# Altium PCB Module+.PcbDoc
Units mil, origin at the board's own origin, x right, y up, seen from the top; angles counter-clockwise.
Board outline 59055.12 x 27559.06 mil, 2 copper layers (Top Layer, Bottom Layer); 170 components, 151 nets, 558 pads, 61 vias.
Unrouted connection lines stored in the file: 22.
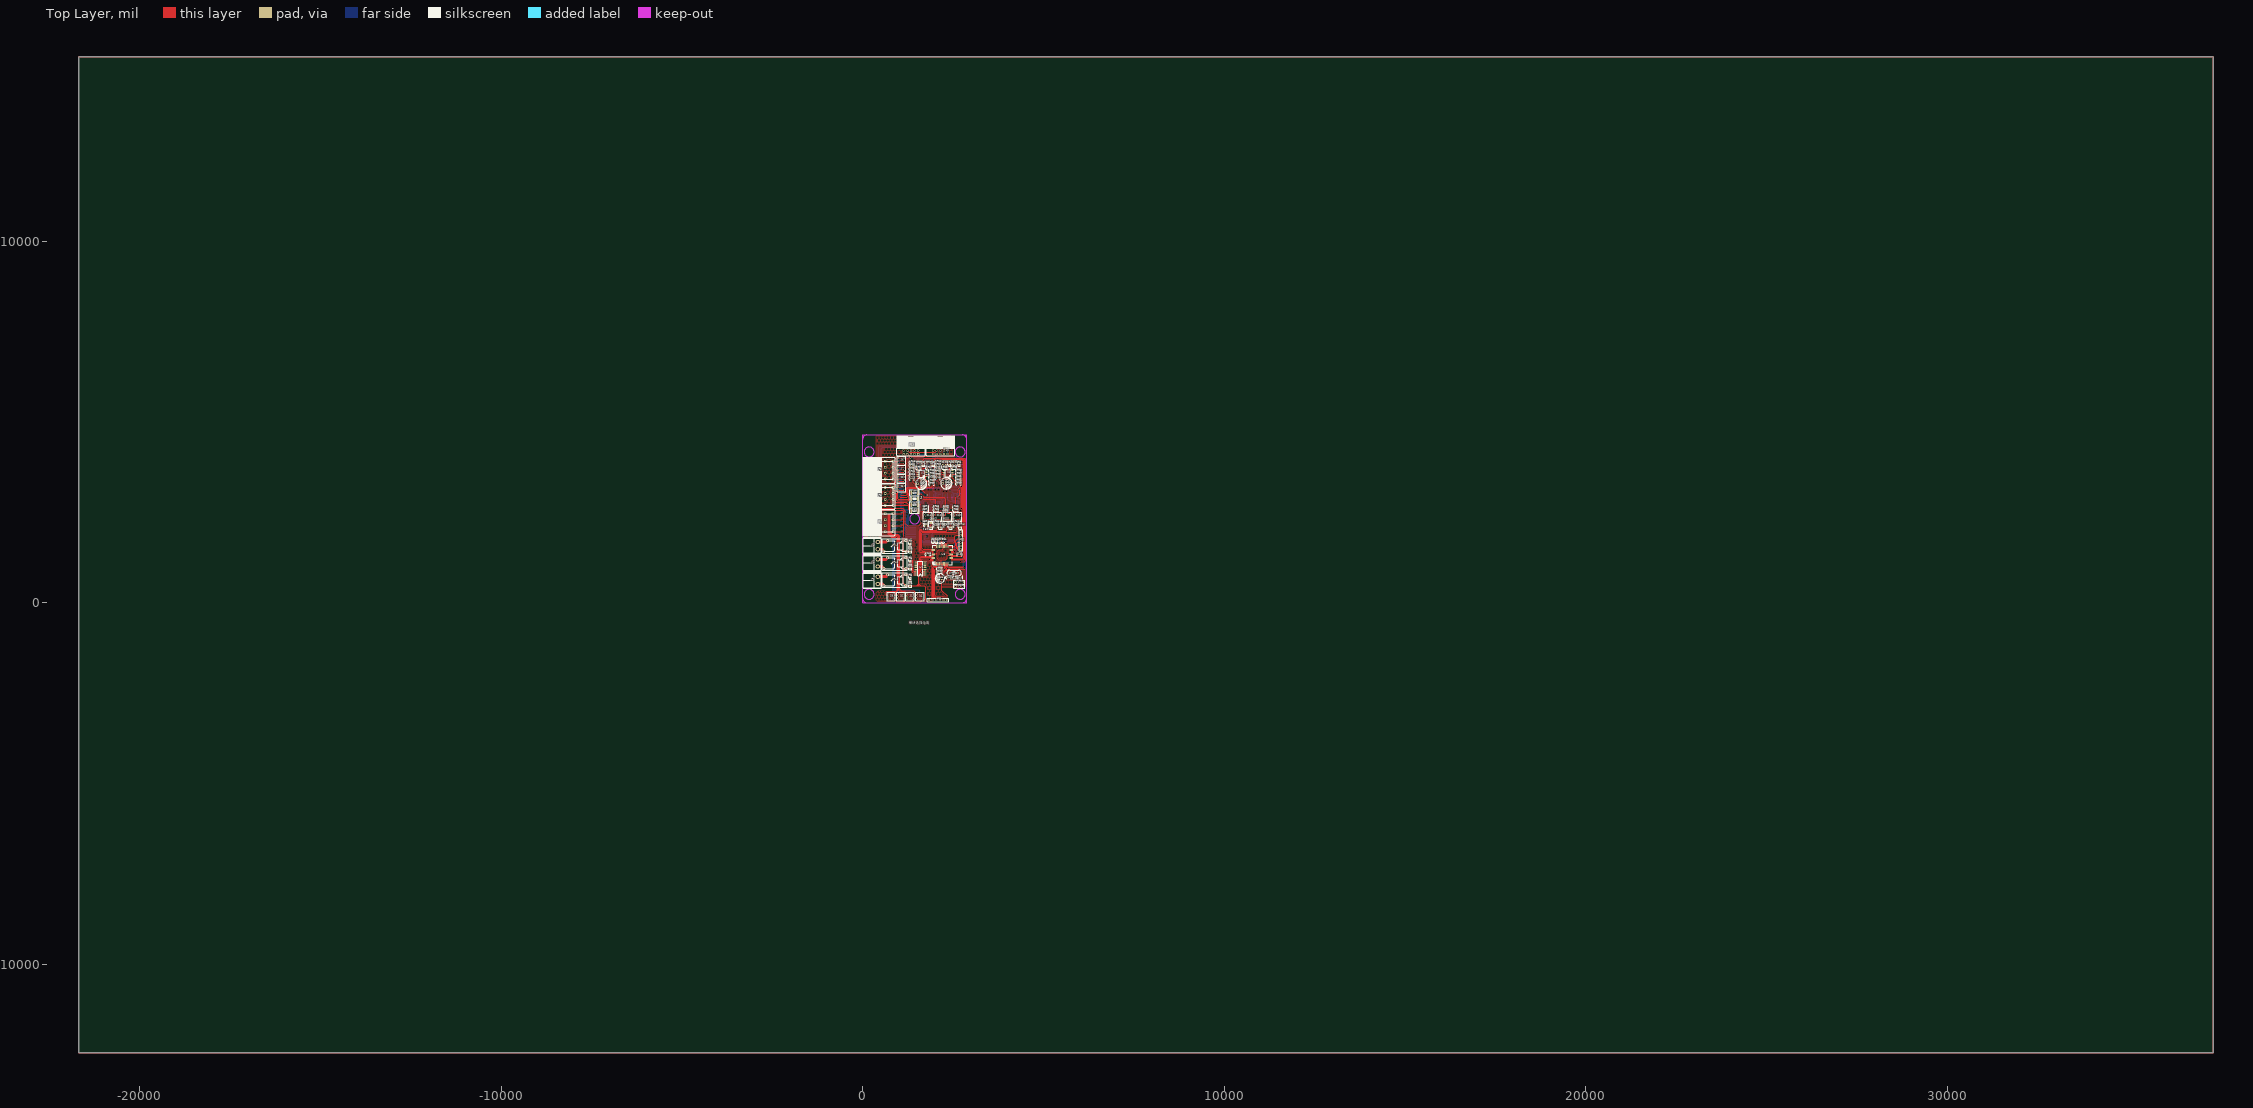
[diagram p0: Top Layer view]
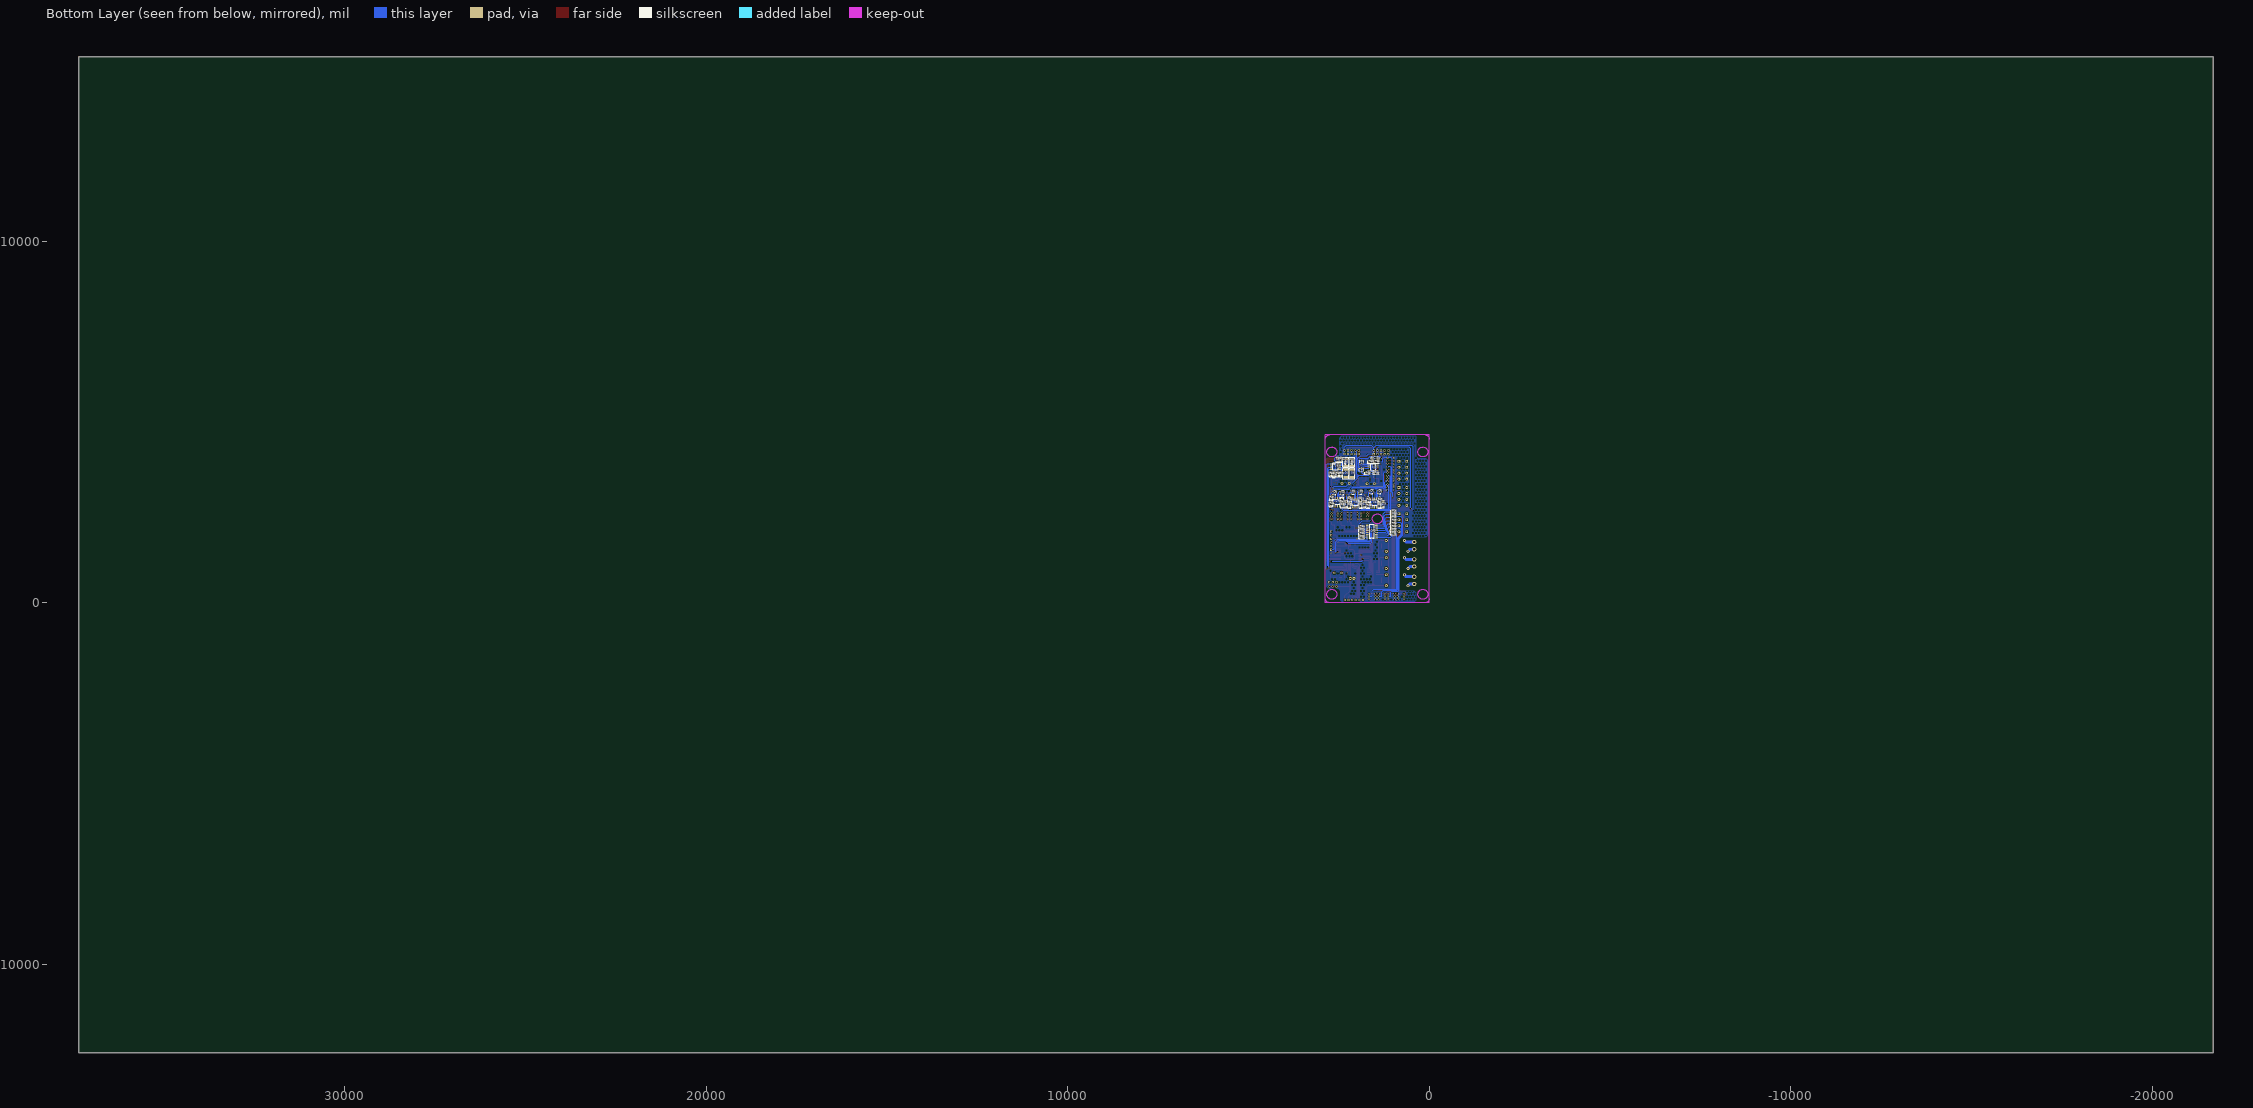
[diagram p1: Bottom Layer view, seen from below]
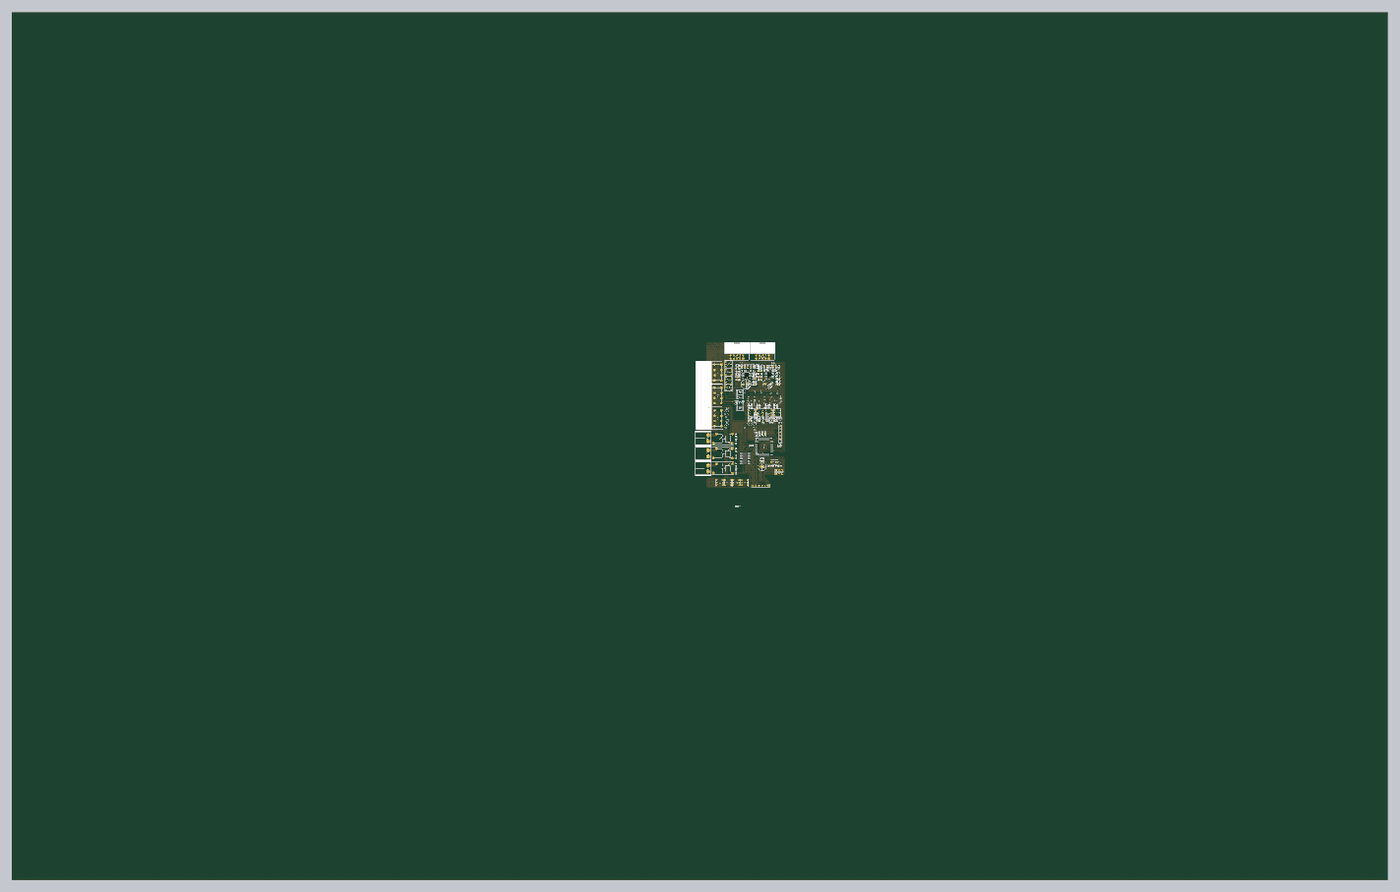
[diagram p2: 3D render of the assembled board from above, using the file's embedded part models]
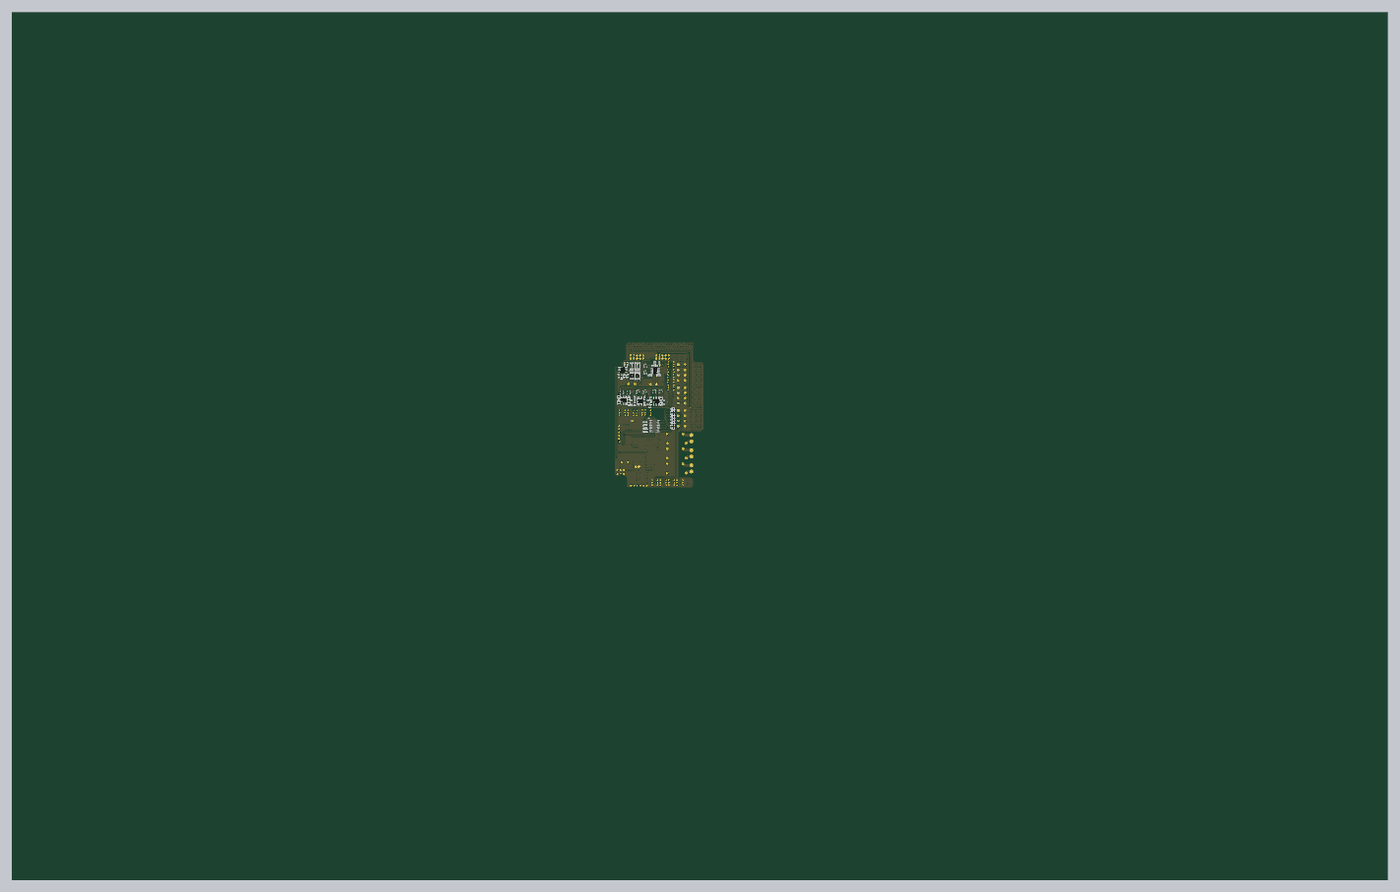
[diagram p3: 3D render of the assembled board from below, using the file's embedded part models]

## Layer stack, top to bottom
Top Solder: solder mask 0.4, Solder Resist, Dk 3.5
Top Layer: signal copper 1.4
Dielectric 1: dielectric 12.6, FR-4, Dk 4.8
Bottom Layer: signal copper 1.4
Bottom Solder: solder mask 0.4, Solder Resist, Dk 3.5

## Board outline
-21689.92,-12450.94 -21689.92,15108.11 37365.2,15108.11 37365.2,-12450.94

## Design rules (kind name [scope] priority, off if disabled: settings)
Clearance Clearance_1 [All] p1: gap=10
Clearance [All] p2 off: gap=20
PolygonConnect [All] p1: connectstyle=Relief reliefconductorwidth=10 reliefentries=4 polygonreliefangle="90 Angle" airgapwidth=10
RoomDefinition Module [InComponentClass('Module')] p1: confinementstyle=ConfineIn formatcopy=TRUE lockcomponents=FALSE outline -12675,-22205.51 33805,-22205.51 33805,-19595.51 -12675,-19595.51
RoutingVias [All] p1: holewidth=28 width=50 viastyle="Through Hole" minholewidth=28 minwidth=50 maxholewidth=28 maxwidth=50
SolderMaskExpansion [All] p1: expansion=4
Width [All] p1: maxlimit=50 minlimit=10 preferedwidth=15 minimp=50.000000 maximp=50.000000 favimp=50.000000
29 further rules are at their usual default settings.

## Components (designator, comment, footprint, x,y, rotation, side; value= is the part's Value field where it differs from the comment)
C1 "105" C0805C 1590,3847.5 r90 top
C2 "105" C0805C 2300,3857.5 r90 top
C3 "105" C0805C 1870,3847.5 r270 top
C4 "105" C0805C 2575,3857.5 r270 top
C5 "105" C0805C 1495,3847.5 r90 top
C6 "105" C0805C 2205,3857.5 r90 top
C7 "105" C0805C 1780,3847.5 r270 top
C8 "105" C0805C 2485,3857.5 r270 top
C9 "104" C0805C 1902.5,3465 r0 top
C10 "104" C0805C 1357.5,3705 r180 top
C11 "104" C0805C 2650.1,3470 r0 top
C12 "104" C0805C 2072.5,3715 r180 top
C13 "104" C0805C 1357.5,3435 r0 top
C14 "104" C0805C 2072.5,3445 r0 top
C15 "220u/35V" E8MM 1620,3295 r0 top
C16 "220u/35V" E8MM 2315,3305 r0 top
C17 "105" C0805C 1902.5,3280 r180 top
C18 "105" C0805C 1357.5,3525 r0 top
C19 "105" C0805C 2650.1,3290 r180 top
C20 "105" C0805C 2072.5,3535 r0 top
C21 "10u/16V" 1206 1500,3985 r180 bottom
C22 "10u/16V" 1206 1805,2720 r270 bottom
C23 "10u/16V" 1206 1285,2720 r270 bottom
C24 "10u/16V" 1206 2313.21,2717.5 r270 bottom
C25 "104" C0805C 2297.5,2135 r180 top
C26 "104" C0805C 2572.5,2135 r180 top
C27 "22p" C0805C 2378,700 r0 top
C28 "22p" C0805C 2698,699.91 r180 top
C29 "104" C0805C 2135,1725 r270 top
C30 "104" C0805C 2125,855 r0 top
C31 "104" C0805C 1757.5,2135 r180 top
C32 "104" C0805C 2672.5,1335 r180 top
C33 "104" C0805C 2022.5,2135 r180 top
C34 "104" C0805C 1802.5,1340 r0 top
C35 "104" C0805C 2230,1725 r90 top
C36 "10uf" E6.5MM 2185,675 r180 top
C37 "104" C0805C 2540,3952.5 r90 bottom
D1 "LED0" LED0805 1310,475 r270 top
D2 "LED0" LED0805 1310,950 r270 top
D3 "LED0" LED0805 1310,1425 r270 top
D4 "LED" LED0805 2636,3588.11 r90 bottom
D5 "SMBJ6.8" SMBJ_SMT 2312.9,3575 r90 bottom
D6 "SMBJ6.8" SMBJ_SMT 2137.9,3575 r90 bottom
DW1 "5.1V" 1206AK 2435,2145 r90 top
DW2 "5.1V" 1206AK 2700,2145 r90 top
DW3 "5.1V" 1206AK 1890,2145 r90 top
DW4 "5.1V" 1206AK 2155,2145 r90 top
F1 "X14" PPTC_SMT 1435,2880 r0 top
F2 "X14" PPTC_SMT 1435,3045 r0 top
F3 "X14" PPTC_SMT 1435.51,2550 r0 top
F4 "X14" PPTC_SMT 1435,2715 r0 top
F5 "X14" PPTC_SMT 2312.9,3880.56 r270 bottom
F6 "X14" PPTC_SMT 2137.9,3880.56 r270 bottom
OP1 "PS2512-4" SO_16 1590,1970 r90 bottom
P1 "DO" PL2Q 417,623 r270 top locked
P2 "DO" PL2Q 417,1102 r270 top locked
P3 "DO" PL2Q 417,1581 r270 top locked
P4 "DI输入" "8P _COM" 731.27,2215.03 r270 top locked
P5 "电压电流转换" "8P _COM" 731.27,3669.97 r270 top locked
P6 "AI输入" "8P _COM" 731.27,2942.5 r270 top locked
P8 "GND" HDR1X3 2570,450 r0 top
P9 "VCC" HDR1X3 2570,570 r0 top
P11 "JTAG" HDR1X6 2715,1470 r90 top
P12 "SPI" HDR1X6 2335,80 r180 top
P13 "Header 10H" FC10P_WAN 1334,4164 r180 top
P14 "Header 10H" FC10P_WAN 2148,4165 r180 top
Q1 "NPN" SOT_23 1875,3890 r180 bottom
Q2 "NPN" SOT_23 1900,3050 r270 bottom
Q3 "NPN" SOT_23 1380,3065 r270 bottom
Q4 "NPN" SOT_23 2408.21,3037.5 r270 bottom
Q5 "PNP" SOT_23 1875,3675 r180 bottom
Q6 "PNP" SOT_23 2115,3050 r270 bottom
Q7 "PNP" SOT_23 1595,3065 r270 bottom
Q8 "PNP" SOT_23 2623.21,3037.5 r270 bottom
R1 "100K" 0805R 1960,3847.5 r90 top
R2 "100K" 0805R 1685,3847.5 r90 top
R3 "100K" 0805R 2665,3857.5 r90 top
R4 "100K" 0805R 2395,3857.5 r90 top
R5 "1K" 0805R 1311,732.5 r90 top
R6 "1K" 0805R 1311,1207.5 r90 top
R7 "1K" 0805R 1311,1680 r90 top
R8 "100K" 0805R 1822.5,3720 r0 top
R9 "100K" 0805R 1547.5,3720 r0 top
R10 "100K" 0805R 2527.5,3740 r0 top
R11 "100K" 0805R 2262.5,3730 r0 top
R12 "10K" 0805R 1902.5,3645 r0 top
R13 "10K" 0805R 1357.5,3885 r180 top
R14 "10K" 0805R 2650.1,3655 r0 top
R15 "10K" 0805R 2072.5,3895 r180 top
R16 "10K" 0805R 1902.5,3555 r180 top
R17 "10K" 0805R 2650,3560 r180 top
R18 "10K" 0805R 1357.5,3795 r0 top
R19 "10K" 0805R 2072.5,3805 r0 top
R20 "100R" 0805R 1902.5,3370 r180 top
R21 "100R" 0805R 1357.5,3615 r0 top
R22 "100R" 0805R 2650,3380 r180 top
R23 "100R" 0805R 2072.5,3625 r0 top
R24 "10K" 0805R 1000,2172.29 r0 bottom
R25 "10K" 0805R 1000,2346.86 r0 bottom
R26 "10K" 0805R 999,2521.43 r0 bottom
R27 "10K" 0805R 1000,1997.71 r0 bottom
R28 "10K" 0805R 1000,2085 r0 bottom
R29 "10K" 0805R 1000,2259.57 r0 bottom
R30 "10K" 0805R 1000,2434.15 r0 bottom
R31 "10K" 0805R 1000,1910.43 r0 bottom
R32 "10K" 0805R 1876.04,1896.09 r0 bottom
R33 "10K" 0805R 1876.04,1996.09 r0 bottom
R34 "10K" 0805R 1876.04,2096.09 r0 bottom
R35 "10K" 0805R 1876.04,1801.09 r0 bottom
R36 "200k" 0805R 1467.5,3890 r180 bottom
R37 "200k" 0805R 1900,2680 r270 bottom
R38 "200k" 0805R 1380,2680 r270 bottom
R39 "200k" 0805R 2408.21,2685 r270 bottom
R40 "1.5K" 0805R 1475,3575 r0 bottom
R41 "1.5K" 0805R 2215,2682.5 r90 bottom
R42 "1.5K" 0805R 1695,2677.5 r90 bottom
R43 "150R" 0805R 1720,3575 r180 bottom
R44 "150R" 0805R 2215,2855 r270 bottom
R45 "150R" 0805R 1695,2842.5 r270 bottom
R46 "1.5K" 0805R 2723.21,2722.5 r90 bottom
R47 "150R" 0805R 2723.21,2890 r270 bottom
R48 "1K" 0805R 1900,2845 r270 bottom
R49 "1K" 0805R 1380,2842.5 r270 bottom
R50 "1K" 0805R 1632.5,3890 r180 bottom
R51 "1K" 0805R 2408.21,2847.5 r270 bottom
R52 "10K" 0805R 2297.5,2560 r0 top
R53 "10K" 0805R 2567.5,2560 r0 top
R54 "10K" 0805R 2297.5,2645 r180 top
R55 "250R" 0805R 2297.5,2225 r0 top
R56 "10K" 0805R 2567.5,2645 r180 top
R57 "250R" 0805R 2570,2225 r0 top
R58 "1M" 0805R 2537.5,700 r0 top
R59 "10K" 0805R 2125,940 r0 top
R60 "10K" 0805R 1752.5,2560 r0 top
R61 "10K" 0805R 2022.5,2560 r0 top
R62 "10K" 0805R 1752.5,2645 r180 top
R63 "250R" 0805R 1755,2225 r0 top
R64 "10K" 0805R 2022.5,2645 r180 top
R65 "250R" 0805R 2022.5,2225 r0 top
R66 "10K" 0805R 2040,1720 r90 top
R67 "???" 0805R 1945,1717.5 r270 top
R68 "1K" 0805R 2730,3552.5 r270 bottom
R69 "3K" 0805R 2540,3552.5 r270 bottom
R70 "120R?" 0805R 2445,3552.5 r270 bottom
R71 "3K" 0805R 2450,3952.5 r270 bottom
RL1 "" HF32A4 888,625 r180 top locked
RL2 "" HF32A4 888,1099 r180 top locked
RL3 "" HF32A4 888,1573 r180 top locked
S1 "SW-DPDT" BUTTON 1314.53,173.74 r0 top
S2 "SW-DPDT" BUTTON 1050.47,173.74 r0 top
S3 "SW-DPDT" BUTTON 786.42,173.74 r0 top
S4 "SW-DPDT" BUTTON 1578.58,173.74 r0 top
S5 "SW-DPDT" BUTTON 1068.58,3193.74 r180 top
S6 "SW-DPDT" BUTTON 1068.58,3930 r180 top
S7 "SW-DPDT" BUTTON 1068.58,3684.58 r180 top
S8 "SW-DPDT" BUTTON 1068.58,3439.16 r180 top
S9 "SW-DPDT" button 2343.81,2393.74 r0 top
S10 "SW-DPDT" BUTTON 2616.42,2393.74 r0 top
S11 "SW-DPDT" BUTTON 1798.58,2393.74 r0 top
S12 "SW-DPDT" BUTTON 2071.19,2393.74 r0 top
U1 "2003" SO_16 1595,950 r90 top
U2 "LM358" SOP-08 1640,3575 r90 top
U3 "LM358" SOP-08 2365,3585 r90 top
U4 "LM358" SOP-08 1560,3735 r90 bottom
U5 "LM358" SOP-08 2055,2765 r180 bottom
U6 "LM358" SOP-08 1535,2760 r180 bottom
U7 "LM358" SOP-08 2563.21,2782.5 r180 bottom
U8 "Atmega16" QFP44 2201,1320 r90 top
U9 "U485" SOP8 2595,3760 r270 bottom
Y1 "8M" XTAL-M 2630.5,827 r180 top

## Footprints (in the part's own frame and the unit in brackets; to place one, negate y for a bottom-side part, rotate by r counter-clockwise, add the part's x,y. Pads: shape width x height; smd on the part's side, far side on the other; paste and mask are expansions set on the pad)
"8P _COM" [mm]
  rect 2x2 hole 1: 1(-6.3,2.75)
  round 2 hole 1: 2(-6.3,-2.75) 3(-2.1,2.75) 4(-2.1,-2.75) 5(2.1,2.75) 6(2.1,-2.75) 7(6.3,2.75) 8(6.3,-2.75)
  silkscreen extent -9.1,-18.04 9.1,4.2
0805R [mil]
  rrect30% 40x50 smd: 1(-42.5,0) 2(42.5,0)
  silkscreen extent -75,-38 75,38, body extent -39,-25 40,25, height 30
1206 [mil]
  rect 50x60 smd: 1(-65,0) 2(65,0)
  silkscreen extent -105,-45 105,45
1206AK [mil]
  rect 50x60 smd: A(-65,0) K(65,0)
  silkscreen extent -105,-45 118,45
BUTTON [mm]
  round 1.2 hole 0.8: 1(-2.25,0) 2(-2.25,2) 3(-2.25,-2) 4(2.25,0) 5(2.25,2) 6(2.25,-2)
  silkscreen extent -3,-3 3,3
button [mm]
  round 1.2 hole 0.8: 1(-2.25,0) 2(-2.25,2) 3(-2.25,-2) 4(2.25,0) 5(2.25,2) 6(2.25,-2)
  silkscreen extent -3,-3 3,3
C0805C [mil]
  rrect30% 40x50 smd: 1(-42.5,0) 2(42.5,0)
  silkscreen extent -75,-38 75,38, body extent -39,-25 39,25, height 30
E6.5MM [mm]
  round 2 hole 0.9: 1(0,0) 2(2.54,0)
  silkscreen extent -2.03,-3.3 4.57,3.3
E8MM [mm]
  round 2 hole 1: 1(-2.54,0) 2(2.54,0)
  silkscreen extent -4,-4 4,4, body extent -4.01,-4.04 4.01,3.99, height 7
FC10P_WAN [mm]
  rect 1.6x1.6 hole 0.914: 1(-5.08,1.27)
  round 1.6 hole 0.914: 2(-5.08,-1.27) 3(-2.54,1.27) 4(-2.54,-1.27) 5(0,1.27) 6(0,-1.27) 7(2.54,1.27) 8(2.54,-1.27) 9(5.08,1.27) 10(5.08,-1.27)
  silkscreen extent -10,-11.75 10,2.55
HDR1X3 [mm] "Connector; Header; 3 Position"
  rect 1.5x1.5 hole 0.9: 1(0,0)
  round 1.5 hole 0.9: 2(2.54,0) 3(5.08,0)
  silkscreen extent -1.27,-1.27 6.35,1.27
HDR1X6 [mm] "Connector; Header; 6 Position"
  rect 1.5x1.5 hole 0.9: 1(0,0)
  round 1.5 hole 0.9: 2(2.54,0) 3(5.08,0) 4(7.62,0) 5(10.16,0) 6(12.7,0)
  silkscreen extent -1.27,-1.27 13.97,1.27
HF32A4 [mm]
  round 2 hole 0.9: 1(-7.62,3.81) 2(-7.62,-3.81) 3(7.62,3.81) 4(5.08,-3.81)
  silkscreen extent -8.89,-5.08 8.89,5.08
LED0805 [mil]
  rect 50x50 smd: 1(0,0) 2(-80,0)
  silkscreen extent -135,-40 40,40
PL2Q [mm]
  round 3 hole 1.6: 1(-2.54,0) 2(2.54,0)
  silkscreen extent -6.1,-10.29 6.1,2.67
PPTC_SMT [mm]
  rect 1.2x3.4 smd: 1(-2.4,0) 2(2.4,0)
  silkscreen extent -3.3,-2 3.3,2, body extent -2.36,-2.08 2.62,2.08, height 0.5
QFP44 [mil]
  oval 100x16 smd: 1(-245,157) 2(-245,126) 3(-245,94) 4(-245,63) 5(-245,31) 6(-245,0) 7(-245,-31) 8(-245,-63) 9(-245,-94) 10(-245,-126) 11(-245,-157) 23(245,-157) 24(245,-126) 25(245,-94) 26(245,-63) 27(245,-31) 28(245,0) 29(245,31) 30(245,63) 31(245,94) 32(245,126) 33(245,157)
  oval 16x100 smd: 12(-157,-245) 13(-126,-245) 14(-94,-245) 15(-63,-245) 16(-31,-245) 17(0,-245) 18(31,-245) 19(63,-245) 20(94,-245) 21(126,-245) 22(157,-245) 34(157,245) 35(126,245) 36(94,245) 37(63,245) 38(31,245) 39(0,245) 40(-31,245) 41(-63,245) 42(-94,245) 43(-126,245) 44(-157,245)
  silkscreen extent -270,-270 270,270
SMBJ_SMT [mil]
  rect 70x133.86 smd: A(-100,0) K(100,0)
  silkscreen extent -150,-79 149,79, body extent -91,-53 91,53, height 94
SO_16 [mil]
  rect 30x80 smd: 1(-175,-125)
  oval 30x80 smd: 2(-125,-125) 3(-75,-125) 4(-25,-125) 5(25,-125) 6(75,-125) 7(125,-125) 8(175,-125) 9(175,125) 10(125,125) 11(75,125) 12(25,125) 13(-25,125) 14(-75,125) 15(-125,125) 16(-175,125)
  silkscreen extent -195,-70 195,70, body extent -194,-115 192,113, height 69
SOP8 [mil]
  oval 24x80 smd: 1(-75,-110) 2(-25,-110) 3(25,-110) 4(75,-110) 5(75,110) 6(25,110) 7(-25,110) 8(-75,110)
  silkscreen extent -95,-75 95,75, body extent -97,-118 96,118, height 61
SOP-08 [mil]
  oval 24x80 smd: 1(-75,-110) 2(-25,-110) 3(25,-110) 4(75,-110) 5(75,110) 6(25,110) 7(-25,110) 8(-75,110)
  silkscreen extent -95,-75 95,75, body extent -97,-118 96,118, height 61
SOT_23 [mil]
  rect 30x40 smd: 1(-40,-50) 2(40,-50) 3(0,50)
  silkscreen extent -60,-35 60,35
XTAL-M [mil]
  round 62 hole 35.43: 1(0,0) 2(200,0)
  silkscreen extent -100,-80 300,80

## Part data
C1 C2 C5 C6 C9 C10 C11 C12 C13 C14 C17 C18 C19 C20 C21 C22 C23 C24 C25 C26 C31 C33 C37: library part CAP, "Capacitor"
C3 C4 C7 C8 C27 C28 C29 C30 C32 C34 C35: library part Cap, "Capacitor"
C15 C16: library part ELECTRO1, "Electrolytic Capacitor"
C36: library part "Cap Pol1", "Polarized Capacitor (Radial)"
D1 D2 D3: "Typical INFRARED GaAs LED"
D5 D6 DW1 DW2 DW3 DW4: library part DIODE, "Diode"
F1 F2 F3 F4 F5 F6: library part "Fuse 1", "Fuse"
P1 P2 P3: library part "Header 2", "Header, 2-Pin"
P4 P5 P6: library part "Header 8", "Header, 8-Pin"
P8 P9: library part "Header 3", "Header, 3-Pin"
P11 P12: library part "Header 6", "Header, 6-Pin"
P13 P14: "Header, 10-Pin, Right Angle"
Q1 Q2 Q3 Q4: "NPN Bipolar Transistor"
Q5 Q6 Q7 Q8: "PNP Bipolar Transistor"
R1 R2 R3 R4 R5 R6 R7 R8 R9 R10 R11 R12 R13 R14 R15 R16 R17 R18 R19 R20 R21 R22 R23 R24 R25 R26 R27 R28 R29 R30 R31 R36 R37 R38 R39 R40 R41 R42 R43 R44 R45 R46 R47 R48 R49 R50 R51 R52 R53 R54 R55 R56 R57 R58 R59 R60 R61 R62 R63 R64 R65 R66 R67 R69 R70 R71: library part Res2, "Resistor"
R32 R33 R34 R35 R68: library part res
RL1 RL2 RL3: library part RELAY
S1 S2 S3 S4 S5 S6 S7 S8 S9 S10 S11 S12: "Double-Pole, Double-Throw Switch"
U1: library part ULN2003A, "High-Voltage, High-Current Darlington Array"
Y1: library part XTAL, "Crystal Oscillator"

## Via types
v1: diameter 25, hole 15, Top Layer to Bottom Layer, tented both sides, 40 vias
v2: diameter 30, hole 15, Top Layer to Bottom Layer, tented both sides, 12 vias
v3: diameter 35, hole 25, Top Layer to Bottom Layer, tented both sides, 7 vias
v4: diameter 50, hole 28, Top Layer to Bottom Layer, tented both sides, 1 vias
v5: diameter 35, hole 15, Top Layer to Bottom Layer, tented both sides, 1 vias

## Nets (pads, with @x,y where several pads share a name; then routed paths per layer and width w, separated by ;. In a path a pad name is that pad's centre, name@x,y a point inside that pad or via, vN(x,y) a via of type N, cw(c..) or ccw(c..) an arc to the next point about the centre after c; other vN are vias at no path point)
0~10V(1): C11.2 C19.1 C21.1 R17.1 R22.1 R36.2 S6.3 S6.6 | length 4384.7
  Top Layer w15: S6.6 S6.3 ; v5(1010,2920) 1225,2920 1255,2950 1255,3125 1295,3165 1585,3165 1710,3040 2630,3040 2640,3050 2640,3155 2692.6,3207.6 C19.1 2692.5,3290.1 R22.1 2692.6,3380.1 C11.2 2692.5,3470.1 R17.1
  Bottom Layer w15: v5(1010,2920) 1010,3050 1021.12,3061.12 1021.12,3981.12 1048.74,4008.74 S6.3 1261.26,4008.74 1285,3985 1285,3910 1305,3890 R36.2 1430,3895 1430,3925 1440,3935 1495,3935 1505,3945 1505,3970 1520,3985 C21.1
0~10V(2): C12.2 C20.1 C24.1 R19.1 R23.1 R39.2 S7.3 S7.6 | length 4829.6
  Top Layer w15: S7.6 S7.3 ; v2(1050,2980) 1205,2980 1230,3005 1230,3159.64 1260.36,3190 1945,3190 1990,3235 1990,3510 2015,3535 C20.1 R23.1 C12.2 R19.1
  Bottom Layer w15: S7.3 1078.32,3763.32 1050,3735 v2(1050,2980) 1050,2600 1105,2545 2365,2545 2408.21,2588.21 R39.2 2378.21,2642.5 2368.21,2652.5 2368.21,2701.27 2351.98,2717.5 2323.21,2717.5 2313.21,2727.5 C24.1
0~10V(3): C9.2 C17.1 C22.1 R16.1 R20.1 R37.2 S8.3 S8.6 | length 3565.8
  Top Layer w15: S8.6 S8.3 ; v1(1085,3045) 1190,3045 1205,3060 1205,3170 1250,3215 1910,3215 1945,3250 C17.1 R20.1 C9.2 R16.1
  Bottom Layer w15: S8.3 1117.9,3517.9 1085,3485 v1(1085,3045) 1085,2600.36 1115.36,2570 1872.5,2570 1900,2597.5 R37.2 1872.5,2637.5 1857.5,2652.5 1857.5,2720 1852.5,2725 1815,2725 1805,2735 C22.1
0~10V(4): C10.2 C18.1 C23.1 R18.1 R21.1 R38.2 S5.3 S5.6 | length 2199.9
  Top Layer w15: S5.6 S5.3 1237.48,3272.48 1237.48,3517.48 1245,3525 C18.1 R21.1 C10.2 R18.1
  Bottom Layer w15: 1205,3162.83 1205,3255 1187.52,3272.48 S5.3 1115,3230.31 1115,2625 1145,2595 1370,2595 1380,2605 R38.2 1357.5,2637.5 1345,2650 1345,2690 1330,2705 1295,2705 1285,2715 C23.1
5V: C30.2 C32.2 C34.2 C35.1 C36.1 C37.1 P8.1 P8.2 P8.3 P11.1 P12.1 P13.3 P13.4 P14.3 P14.4 R32.2 R33.2 R34.2 R35.2 R59.2 R66.2 R69.2 U8.5 U8.17 U8.27 U8.38 U9.8 | length 11861.2
  Top Layer w15: C34.2 1856,1351 U8.38 2055,1351 ; 2051.97,1334.03 2035,1351 2051.97,1367.97 ; R59.2 2170,942.5 U8.5 2170,1190 ; 2170,1170 2186.97,1186.97 ; C35.1 2232,1680.5 U8.27 2232,1500 2207,1475 2105,1475 2056,1426 2056,1230 2096,1190 2300,1190 2340,1230 2340,1300 2360,1320 U8.17 2620,1320 C32.2@2635,1335 ; C32.2 2630,1390 2645,1405 2695,1405 2715,1425 P11.1
  Top Layer w30: v3(515,2610) 1110,2610 1180,2540 1180,2190 1240,2130 1550,2130 1620,2200 v3@1620,2245 ; P13.4 1434,4269 1460,4295 2215,4295 2248,4262 P14.4 ; v1(1995,1765) 1997.5,1762.5 R66.2 ; R59.2 C30.2 2167.5,692.5 C36.1 2185,340 2335,190 P12.1 ; 2195,450 P8.1 P8.2 P8.3
  Bottom Layer w15: R69.2 2590,3560 2590,3905 2595,3910
  Bottom Layer w30: v3(515,2610) 515,4260 555,4300 1405,4300 1434,4271 P13.4 P13.3 ; v3(1620,2250) 1865,2250 1918.54,2196.46 R34.2 R33.2 R32.2 R35.2 1918.54,1765 v1(1995,1765) 2590,1765 2624,1731 2624,1496 2650,1470 P11.1 ; P14.4 P14.3 2248,4067 2265,4050 2561.84,4050 2615,3996.84 2615,3930 2595,3910 ; U9.8 2540,3890 C37.1 2585,3910
12V: C13.2 C14.2 C15.1 C16.1 D1.1 D2.1 D3.1 P13.1 P13.2 P14.1 P14.2 R40.2 R41.2 R42.2 R43.2 R44.2 R45.2 R46.2 R47.2 RL1.1 RL2.1 RL3.1 S1.6 S2.6 S3.6 S4.6 U1.9 U2.8 U3.8 U4.8 U5.8 U6.8 U7.8 | length 16322.3
  Top Layer w30: v3(440,2555) 1105,2555 1140,2520 1140,1835 1120,1815 1120,1455 ; S3.6 940,30 1125,30 ; S2.6 1139.05,44.05 ; D2.1 1189,950 RL2.1 1139,949 ; D3.1 1190,1425 RL3.1 RL3.1@1152,1423 ; 1389.05,30 1403.11,44.05 ; S1.6 1403.11,44.05 ; 1414.05,30 1403.11,40.95 1403.11,44.05 ; 1468.11,30 1602.16,30 ; U1.9 1518.58,1125 1543.58,1100 1543.58,475 ; 1495,475 1537.43,517.43 ; C15.1 1420,3295 1400,3315 C13.2 1505,3435 1530,3460 U2.8 ; 1543.58,525 1586.01,482.57 ; v3(1770,2985) v3@2290,2985 ; C16.1 2115,3405 C14.2 2220,3445 2255,3480 U3.8 ; v3(2290,2980) v3@2290,2985 ; v3(2635,2955) 2655,2955 ; v3(2680,3150) 2680,2980 2655,2955 ; 1120,930 1120,543 RL1.1 D1.1 1543.58,475 ; 1120,930 1120,965 ; 1120,930 1139,949 ; 1120,965 1120,1405 ; 1120,965 1136,949 1139,949 ; 1120,1405 1120,1455 ; 1120,1405 1138,1423 RL3.1@1152,1423 ; 1120,1455 RL3.1@1152,1423 ; 1125,30 1270,30 ; 1125,30 1139.05,44.05 ; 1139.05,44.05 1139.05,40.95 1150,30 1270,30 ; 1270,30 1602.16,30 ; 1543.58,475 1700,475 1745,430 1745,115 1725,95 S4.6 1602.16,30 ; v3@2290,2985 2625,2985 2655,2955
  Bottom Layer w15: U7.8@2635,2890.08 v3(2635,2955) ; U7.8 2678.21,2892.5 R47.2
  Bottom Layer w30: v3(440,2555) 440,4315 475,4350 1475,4350 1534,4291 ; C15.1 1517.5,3297.5 R40.2 R43.2@1670,3575 ; U6.8 1625,2870 R45.2 ; U4.8 R43.2@1670,3575 ; R42.2 R45.2 ; v3(1770,2985) 1770,2875 R45.2 ; U5.8 2152.5,2875 R44.2 ; R41.2 R44.2 ; v3(2290,2980) 2290,2875 2227.5,2812.5 R44.2 ; P14.1 P14.2 2348,4310 2308,4350 1593,4350 1534,4291 ; v3@2685.76,3155.76 2674.7,3166.83 2674.7,3180.3 2640,3215 2305,3215 C16.1 2130,3305 1990,3445 1990,3480 ; R46.2 R47.2 ; 1534,4291 P13.2 P13.1 1686,4114 1745,4055 1915,4055 1990,3980 ; R43.2@1670,3575 1670,3535 1690,3515 1955,3515 ; 1955,3515 1990,3480 ; 1955,3515 1990,3550 ; 1990,3480 1990,3550 ; 1990,3550 2002.5,3562.5 2002.5,3949.71 ; 1990,3980 2002.5,3967.5 2002.5,3949.71 ; 1990,3980 1990,3962.21 2002.5,3949.71
485A: F6.1 P13.8 P14.8 | length 1279.6
  Top Layer w10: P13.8 1283,4165 2004.99,4165 2048,4208.01 P14.8
  Bottom Layer w10: P14.8 2000,4167 2000,4030 2054.95,3975.05 F6.1 F6.1@2192.9,3975.05
485B: F5.1 P13.7 P14.7 | length 1247.7
  Top Layer w10: P13.7 1246,4114 1305,4055 1988,4055 P14.7
  Bottom Layer w10: P14.7 2048,4037 2065,4020 2295,4020 2312.9,4002.1 F5.1
ADC1: C26.1 DW2.K S10.4 U8.34 | length 2281.8
  Top Layer w15: U8.34 1668,1477 1635,1510 1635,1930 1660,1955 2590,1955 2615,1980 C26.1 2620,2140 2685,2140 2700,2155 DW2.K 2750,2260 2750,2346.24 2705,2391.24 S10.4
ADC2: C25.1 DW1.K S9.4 U8.35 | length 2090.3
  Top Layer w15: U8.35 1649,1446 1610,1485 1610,1955 1635,1980 2305,1980 2340,2015 C25.1 2420,2135 2435,2150 DW1.K 2480,2255 2480,2346.13 S9.4
ADC3: C33.1 DW4.K S12.4 U8.36 | length 1928
  Top Layer w15: U8.36 1611,1414 1585,1440 1585,1984.64 1605.36,2005 2045,2005 2065,2025 C33.1 2140,2135 2155,2150 DW4.K 2170,2210 2205,2245 2205,2360 2171.26,2393.74 S12.4
ADC4: C31.1 DW3.K S11.4 U8.37 | length 1702.5
  Top Layer w15: S11.4 1930,2350.9 1930,2250 DW3.K 1890,2155 1870,2135 C31.1 1800,2060 1770,2030 1595,2030 1560,1995 1560,1415 1592,1383 U8.37
AI1: F2.1 P6.1 | length 930.1
  Top Layer w15: P6.1 839.54,3130.46 875,3095 927.5,3095 967.5,3055 967.5,2885 987.5,2865 1265,2865 1280,2880 1280,3025 1300,3045 F2.1
AI2: F1.1 P6.3 | length 709.3
  Top Layer w15: P6.3 929.82,3025.18 942.5,3012.5 942.5,2837.5 955.18,2824.82 1264.82,2824.82 1320,2880 F1.1
AI3: F4.1 P6.5 | length 561
  Top Layer w15: P6.5 914.36,2785 1205,2785 1275,2715 F4.1
AI4: F3.1 P6.7 | length 619.9
  Top Layer w15: P6.7 1245.53,2694.47 1270,2670 1270,2570 1290,2550 F3.1
AOMA1: P5.1 S6.1 S6.4 | length 322.6
  Top Layer w15: P5.1 968,3918 S6.4 S6.1
AOMA2: P5.3 S7.1 S7.4 | length 372.2
  Top Layer w15: P5.3 902.35,3752.65 915,3740 915,3695 925.42,3684.58 S7.4 S7.1
AOMA3: P5.5 S8.1 S8.4 | length 449.3
  Top Layer w15: P5.5 892.71,3587.29 900,3580 900,3460 920.84,3439.16 S8.4 S8.1
AOMA4: P5.7 S5.1 S5.4 | length 520.5
  Top Layer w15: P5.7 893.06,3421.94 915,3400 915,3215 936.26,3193.74 S5.1
AREF: C29.2 U8.29 | length 132
  Top Layer w15: C29.2 2135,1670 2170,1635 U8.29
DI1: OP1.2 P4.7 R27.2 | length 798.8
  Top Layer w15: P4.7 1085,1967 1090,1972 v1(1090,1995)
  Bottom Layer w15: R27.2 v1@1090,1997.72 ; 1102.28,1997.72 1125,1975 1125,1890 1170,1845 OP1.2
DI1_1: P4.8 S4.1 | length 2876.3
  Top Layer w15: 760,2455 760,1963.14 823.14,1900 970,1900 1025,1845 1025,370 1060,335 1412.76,335 1448.88,298.88 1448.88,214.86 S4.1
DI2: OP1.4 P4.5 R24.2 | length 896.1
  Top Layer w15: P4.5 1077.35,2132.35 1090,2145 v1(1090,2175)
  Bottom Layer w15: R24.2 1152.71,2172.29 1175,2150 1175,1990 1220,1945 OP1.4
DI2_2: P4.6 S1.1 | length 2646.7
  Top Layer w15: 730,2455 730,1950.71 810.71,1870 964.64,1870 1000,1834.64 1000,350 1040,310 1156.84,310 1184.82,282.02 1184.82,218.2 S1.1@1229.28,173.74
DI3: OP1.6 P4.3 R25.2 | length 978.7
  Top Layer w15: P4.3 1077.71,2297.71 1090,2310 v1(1090,2345)
  Bottom Layer w15: R25.2 1198.14,2346.86 1225,2320 1225,2080 1260,2045 OP1.6
DI3_3: P4.4 S2.1 | length 2519.1
  Top Layer w15: 705,2455 705,1940.36 800.36,1845 940,1845 975,1810 975,339.64 920.77,285.41 920.77,214.86 S2.1 ; S2.1@965.22,177.07 S2.1@968.56,173.74
DI4: OP1.8 P4.1 R26.2 | length 1046.7
  Top Layer w15: P4.1 1080,2463.06 1090,2473.06 v1(1090,2510)
  Bottom Layer w15: R26.2 1052.93,2510 v1(1090,2510) 1230,2510 1275.93,2464.07 1275.93,2164.07 1295,2145 OP1.8
DI4_4: P4.2 S3.1 | length 2218.9
  Top Layer w15: 680,1930 790,1820 905,1820 950,1775 950,350 915,315 670,315 655,300 655,216.58 S3.1
DO1: P1.2 RL1.3 | length 381.8
  Top Layer w80: P1.2 540,523 RL1.3
  Bottom Layer w80: P1.2 540,523 RL1.3
DO1_1: P1.1 RL1.4 | length 585.1
  Top Layer w80: P1.1 636,723 RL1.4
  Bottom Layer w80: P1.1 636,723 RL1.4
DO2: P2.2 RL2.3 | length 385.9
  Top Layer w80: P2.2 535,1002 RL2.3
  Bottom Layer w80: P2.2 535,1002 RL2.3
DO2_2: P2.1 RL2.4 | length 580.9
  Top Layer w80: P2.1 641,1202 RL2.4
  Bottom Layer w80: P2.1 641,1202 RL2.4
DO3: P3.2 RL3.3 | length 390
  Top Layer w80: P3.2 530,1481 RL3.3
  Bottom Layer w80: P3.2 530,1481 RL3.3
DO3_3: P3.1 RL3.4 | length 576.8
  Top Layer w80: P3.1 646,1681 RL3.4
  Bottom Layer w80: P3.1 646,1681 RL3.4
GND: C1.2 C2.2 C3.1 C4.1 C5.2 C6.2 C7.1 C8.1 C13.1 C14.1 C15.2 C16.2 C17.2 C18.2 C19.2 C20.2 C21.2 C22.2 C23.2 C24.2 C25.2 C26.2 C28.2 C29.1 C30.1 C31.2 C32.1 C33.2 C34.1 C35.2 C36.2 C37.2 D5.A D6.A DW1.A DW2.A DW3.A DW4.A OP1.9 OP1.11 OP1.13 OP1.15 P5.2 P5.4 P5.6 P5.8 P6.2 P6.4 P6.6 P6.8 P9.1 P9.2 P9.3 P11.6 P12.6 P13.5 P13.6 P14.5 P14.6 R12.2 R13.2 R14.2 R15.2 R48.1 R49.1 R50.1 R51.1 R54.2 R55.2 R56.2 R57.2 R58.2 R62.2 R63.2 R64.2 R65.2 R67.1 R68.1 R71.1 S1.3 S2.3 S3.3 S4.3 U1.8 U4.4 U5.4 U6.4 U7.4 U8.6 U8.18 U8.28 U8.39 U9.5 | length 3150.6
  Top Layer w10: 1645,3850 1745,3850 ; v2(1885,1320) U8.39 ; 1910,3850 2025.31,3850 2025.31,3890.31 R15.2 ; v1@1950,3720 1995,3765 ; 2185,1765 2185,1664.8 2201,1648.8 U8.28 ; U8.6 2202.5,1073.5 2202.5,902.5 2250,855 2250,815 ; 2240,1385 2345,1385 2379,1351 U8.18 ; C32.1 v1(2715,1375)
  Top Layer w30: R58.2 2580.09,699.91 C28.2
  Top Layer w50: 2675,2560 2700,2560 2730,2590 v1(2730,2610) v1(2730,3220)
  Bottom Layer w10: v1(1385,3985) C21.2 ; OP1.15 v2(1775,1845) ; OP1.11 1723.91,2036.09 1856.24,2036.09 1868.54,2023.79 ; 1860,2170 1868.54,2161.46 1868.54,2023.79 ; 1860.38,1945 OP1.13 1716.09,1946.09 1860.38,1946.09 1860.38,1947.93 1868.54,1956.09 1868.54,2023.79 ; 1910,3900 1932.5,3900 1947.5,3885 1947.5,3772.5 ; v1(1940,3720) 1940,3765 1947.5,3772.5 ; 1947.5,3800 1947.5,3772.5
  Bottom Layer w30: P13.5 P13.6 ; P14.5 P14.6
  other v1: 1980,2070 2020,2070 2660,2560 2710,2560 2160,2590 2210,2590 1950,2660 1160,2740 1190,2740 1740,2760 2240,3080 2320,3080 2410,3080 1710,3130 1820,3130 1890,3130 2020,3130 2100,3130 2055,3245 2125,3250 2040,3315 2570,3320 2640,3330 1640,3385 1640,3445 1355,3840 1325,3945 1385,3945 1915,3945
INPUT1: OP1.16 R35.1 U8.19 | length 1522
  Top Layer w15: U8.19 2447.5,1381.5 v2(2591.5,1381.5)
  Bottom Layer w15: R35.1 1827.46,1795 OP1.16 1715,1750 1735,1730 2551.5,1730 2591.5,1690 v2(2591.5,1381.5)
INPUT2: OP1.14 R32.1 U8.20 | length 1618.6
  Top Layer w15: U8.20 v2(2539,1414)
  Bottom Layer w15: R32.1 1832.45,1895 OP1.14 1665,1895 1640,1870 1640,1735 1670,1705 2510,1705 2540,1675 2540,1415 v2(2539,1414)
INPUT3: OP1.12 R33.1 U8.25 | length 1282.3
  Top Layer w15: U8.25 v2(2295,1670)
  Bottom Layer w15: R33.1 1832.46,1995 OP1.12 1645,1995 1615,1965 1615,1719.64 1663.14,1671.5 2293.5,1671.5 v2(2295,1670)
INPUT4: OP1.10 R34.1 U8.26 | length 1415.2
  Top Layer w15: U8.26 v2(2264,1639)
  Bottom Layer w15: R34.1 1832.46,2095 OP1.10 1605,2095 1590,2080 1590,1680 1631,1639 v2(2264,1639)
MAOUT1: Q5.1 S6.2 S6.5 | length 1543.1
  Top Layer w15: S6.5 S6.2 1211.26,3851.26 1235,3875 1235,3995 1255,4015 1315,4015 1320,4020 v4(1325,4015)
  Bottom Layer w15: v4(1325,4015) 1350,4040 1645,4040 1705,3980 1926.25,3980 1970,3936.25 1970,3640 1955,3625 Q5.1
MAOUT2: Q8.1 S7.2 S7.5 | length 2164.4
  Top Layer w15: S7.5 S7.2
  Bottom Layer w15: S7.2 1249.16,3605.84 1260,3595 1260,3225 1290,3195 2190,3195 2210,3175 2210,3145 2230,3125 2656.42,3125 2673.21,3108.21 Q8.1
MAOUT3: Q6.1 S8.2 S8.5 | length 1411.2
  Top Layer w15: S8.5 S8.2
  Bottom Layer w15: S8.2 1214.58,3360.42 1235,3340 1235,3195 1260,3170 2135,3170 2165,3140 Q6.1
MAOUT4: Q7.1 S5.2 S5.5 | length 694
  Top Layer w15: S5.5 S5.2
  Bottom Layer w15: S5.2 1205,3115 1235,3145 1605,3145 Q7.1
MISO: P12.4 U8.2 | length 1166.9
  Top Layer w10: P12.4 2035,125 2020,140 1970,140 1950,160 1950,985 1970,1005 2065,1005 2075,1015 U8.2
MOSI: P12.5 U8.1 | length 1087.6
  Top Layer w10: P12.5 1930,85 1930,1035 1970,1075 U8.1
NetC1_1: C1.1 R2.1 R9.2 | length 180
  Top Layer w15: R9.2 C1.1 R2.1
NetC2_1: C2.1 R4.1 R11.2 | length 182.1
  Top Layer w15: R11.2 2300,3735 C2.1 R4.1
NetC3_2: C3.2 R1.1 R8.2 | length 177.1
  Top Layer w15: R8.2 1870,3725 C3.2 R1.1
NetC4_2: C4.2 R3.1 R10.2 | length 167.1
  Top Layer w15: R10.2 2575,3745 C4.2 R3.1
NetC5_1: C5.1 R9.1 U2.5 | length 169.5
  Top Layer w15: C5.1 1495,3730 R9.1 1505,3675 U2.5
NetC6_1: C6.1 R11.1 U3.5 | length 175.7
  Top Layer w15: C6.1 2220,3800 R11.1 2220,3695 U3.5
NetC7_2: C7.2 R8.1 U2.3 | length 360.4
  Top Layer w15: U2.3 1695,3600 1680,3615 1680,3710 1690,3720 R8.1 C7.2
NetC8_2: C8.2 R10.1 U3.3 | length 321.6
  Top Layer w15: U3.3 2430,3610 2410,3630 2410,3720 2430,3740 R10.1 C8.2
NetC9_1: C9.1 R12.1 R16.2 U2.2 | length 292.1
  Top Layer w15: U2.2 1855,3550 R16.2 ; C9.1 R16.2 ; R12.1 R16.2
NetC10_1: C10.1 R13.1 R18.2 U2.6 | length 398.6
  Top Layer w15: R13.1 R18.2 C10.1 1441,3705 1453,3693 1453,3616 1469,3600 U2.6
NetC11_1: C11.1 R14.1 R17.2 U3.2 | length 317.6
  Top Layer w15: U3.2 R17.2 ; C11.1 2607.5,3470.1 R17.2 ; R14.1 2607.6,3560.1 R17.2
NetC12_1: C12.1 R15.1 R19.2 U3.6 | length 404.5
  Top Layer w15: R15.1 R19.2 C12.1 2150,3715 2170,3695 2170,3625 2185,3610 U3.6
NetC27_2: C27.2 R58.1 | length 74.5
  Top Layer w30: C27.2 R58.1
NetD1_2: D1.2 R5.1 | length 135.4
  Top Layer w15: D1.2 1311,556 R5.1
NetD2_2: D2.2 R6.1 | length 135.4
  Top Layer w15: D2.2 1311,1031 R6.1
NetD3_2: D3.2 R7.1 | length 132.9
  Top Layer w15: D3.2 1311,1506 R7.1
NetD4_2: D4.2 R68.2 | length 94.8
  Bottom Layer w20: D4.2 2728.11,3508.11 R68.2
NetD5_K: D5.K R70.2 | length 231.4
  Bottom Layer w20: D5.K 2312.9,3622.1 2425,3510 R70.2
NetD6_K: D6.K F6.2 R69.1 R70.1 U9.6 | length 698.5
  Bottom Layer w20: D6.K 2137.9,3735 ; F6.2 2137.9,3735 ; U9.6 2420,3735 ; R69.1@2535,3595 R70.1 2420,3620 2420,3735 ; 2137.9,3735 2420,3735
NetF1_2: F1.2 S9.1 | length 1280.2
  Top Layer w15: F1.2 1580,2880 1600,2900 2260,2900 2300,2860 2300,2438.52 S9.1
NetF2_2: F2.2 S10.1 | length 1619.8
  Top Layer w15: F2.2@1529.49,3020 1600,3020 1685,2935 2545,2935 2570,2910 2570,2435.9 S10.1
NetF3_2: F3.2 S11.1 | length 309.2
  Top Layer w15: F3.2 1640,2550 1665,2525 1665,2415 1686.26,2393.74 S11.1
NetF4_2: F4.2 S12.1 | length 1087.5
  Top Layer w15: F4.2 1585,2715 1615,2745 1615,2840 1640,2865 2000,2865 2025,2840 2025,2436.13 S12.1
NetF5_2: F5.2 R71.2 U9.7 | length 308.9
  Bottom Layer w20: F5.2 2420,3786.07 ; R71.2 2450,3890 2420,3860 2420,3786.07 ; U9.7 2483.93,3786.07 2420,3786.07
NetOP1_1: OP1.1 R31.2 | length 513
  Bottom Layer w15: R31.2 1042.5,1837.5 1085,1795 OP1.1
NetOP1_3: OP1.3 R28.2 | length 574.4
  Bottom Layer w15: R28.2 1130,2085 1150,2065 1150,1940 1195,1895 OP1.3
NetOP1_5: OP1.5 R29.2 | length 655.1
  Bottom Layer w15: R29.2 1180.43,2259.57 1200,2240 1200,2030 1235,1995 OP1.5
NetOP1_7: OP1.7 R30.2 | length 727.5
  Bottom Layer w15: R30.2 1221.78,2434.15 1250.93,2405 1250.93,2124.07 1280,2095 OP1.7
NetQ1_1: Q1.1 R40.1 U4.5 | length 716.2
  Bottom Layer w15: R40.1 1432.5,3587.5 1470,3625 1595,3625 1610,3640 1610,3800 1620,3810 U4.5 1770,3810 1780,3800 1900,3800 1915,3815 Q1.1
NetQ1_2: Q1.2 U4.1 | length 535.9
  Bottom Layer w15: U4.1 1565,3660 1585,3680 1585,3810.36 1614.64,3840 Q1.2
NetQ1_3: Q1.3 R50.2 U4.2 | length 596.4
  Bottom Layer w15: U4.2 1540,3710 1560,3730 1560,3820.71 1590,3850.71 R50.2 1640,3940 Q1.3
NetQ2_1: Q2.1 R41.1 U5.5 | length 686.7
  Bottom Layer w15: Q2.1 1975,3090 1990,3075 1990,2950 1980,2940 1980,2835 2000,2815 2142.5,2815 2160,2797.5 2160,2660 2180,2640 R41.1
NetQ2_2: Q2.2 U5.1 | length 500.1
  Bottom Layer w15: Q2.2 1950,2829.64 1980,2799.64 1989.64,2790 2110,2790 2130,2770 U5.1
NetQ2_3: Q2.3 R48.2 U5.2 | length 559.1
  Bottom Layer w15: Q2.3 1850,2852.5 R48.2 1941.79,2802.5 1979.29,2765 2055,2765 2080,2740 U5.2
NetQ3_1: Q3.1 R42.1 U6.5 | length 694.3
  Bottom Layer w15: Q3.1 1450,3105 1467.5,3087.5 1467.5,3002.75 1460,2995.25 1460,2825 1475,2810 1615,2810 1645,2780 1645,2660 1670,2635 R42.1
NetQ3_2: Q3.2 U6.1 | length 523
  Bottom Layer w15: Q3.2 1430,2819.64 1464.64,2785 1590,2785 1610,2765 U6.1
NetQ3_3: Q3.3 R49.2 U6.2 | length 577.6
  Bottom Layer w15: Q3.3 1330,2850 R49.2 1420,2760 1535,2760 1560,2735 U6.2
NetQ4_1: Q4.1 R46.1 U7.5 | length 620.2
  Bottom Layer w15: Q4.1 2483.21,3077.5 2498.21,3062.5 2498.21,2962.5 2488.21,2952.5 U7.5 2488.21,2852.5 2508.21,2832.5 2628.57,2832.5 2670,2791.07 2670,2700 2690,2680 R46.1
NetQ4_2: Q4.2 U7.1 | length 470.1
  Bottom Layer w15: Q4.2 2458.21,2847.14 2497.86,2807.5 2618.21,2807.5 2638.21,2787.5 U7.1
NetQ4_3: Q4.3 R51.2 U7.2 | length 546.7
  Bottom Layer w15: Q4.3 2358.21,2855 R51.2 2465,2805 2487.5,2782.5 2578.21,2782.5 2588.21,2772.5 U7.2
NetQ5_2: Q5.2 U4.7 | length 232.4
  Bottom Layer w15: U4.7 1805,3710 1835,3680 Q5.2
NetQ5_3: Q5.3 R43.1 U4.6 | length 481.9
  Bottom Layer w15: U4.6 1870,3760 1875,3755 Q5.3 1875,3610 1875,3605.25 1844.75,3575 R43.1
NetQ6_2: Q6.2 U5.7 | length 208.3
  Bottom Layer w15: U5.7 2080,2990 2100,3010 Q6.2
NetQ6_3: Q6.3 R44.1 U5.6 | length 497.9
  Bottom Layer w15: U5.6 2030,3040 2040,3050 Q6.3 2200,3050 2215,3035 R44.1
NetQ7_2: Q7.2 U6.7 | length 222.4
  Bottom Layer w15: U6.7 1560,2995 1590,3025 Q7.2
NetQ7_3: Q7.3 R45.1 U6.6 | length 542.4
  Bottom Layer w15: U6.6 1510,3060 1515,3065 Q7.3 1670,3065 1695,3040 R45.1
NetQ8_2: Q8.2 U7.7 | length 180.8
  Bottom Layer w15: U7.7 2588.21,2982.5 2603.92,2998.21 Q8.2@2672.5,2998.21
NetQ8_3: Q8.3 R47.1 U7.6 | length 439.9
  Bottom Layer w15: U7.6 2538.21,3022.5 2553.21,3037.5 Q8.3 2708.21,3037.5 2723.21,3022.5 2723.21,2955 ; 2723.21,2955 R47.1 2723.21,2955
NetR20_2: R20.2 U2.1 | length 216.6
  Top Layer w15: U2.1 1750,3410 1790,3370 R20.2
NetR21_2: R21.2 U2.7 | length 156.9
  Top Layer w15: R21.2 1465,3550 U2.7
NetR22_2: R22.2 U3.1 | length 218.6
  Top Layer w15: U3.1 2475,3455 2550,3380 R22.2
NetR23_2: R23.2 U3.7 | length 166.9
  Top Layer w15: R23.2 2180,3560 U3.7
NetR24_1: R24.1 R28.1 S1.4 | length 2675.8
  Bottom Layer w15: R24.1 R28.1 932.5,2060 815,2060 780,2025 780,1895 875,1800 875,350 895,330 1285,330 1310,305 1310,190 1326.26,173.74 S1.4 S1.4@1406.44,173.74
NetR25_1: R25.1 R29.1 S2.4 | length 2634.1
  Bottom Layer w15: R25.1 R29.1 917.93,2220 790,2220 755,2185 755,1884.64 850,1789.64 850,325 870,305 1045,305 1060,290 1060,195 1081.26,173.74 S2.4 S2.4@1145.72,173.74
NetR26_1: R26.1 R30.1 S3.4 | length 2580.5
  Bottom Layer w15: S3.4 825,223.74 825,1774.64 730,1869.64 730,2340 770,2380 903.35,2380 R30.1 956.5,2435.15 R26.1
NetR27_1: R27.1 R31.1 S4.4 | length 2601
  Bottom Layer w15: R27.1 R31.1 920,1910.43 900,1890.43 900,370 915,355 1555,355 1580,330 1580,195 1601.26,173.74 S4.4
NetR36_1: R36.1 U4.3 | length 181.2
  Bottom Layer w15: U4.3 1495,3760 1510,3775 R36.1
NetR37_1: R37.1 U5.3 | length 190.2
  Bottom Layer w15: R37.1 2017.5,2722.5 2030,2710 U5.3
NetR38_1: R38.1 U6.3 | length 195.2
  Bottom Layer w15: R38.1 1497.5,2722.5 1510,2710 U6.3
NetR39_1: R39.1 U7.3 | length 184.1
  Bottom Layer w15: R39.1 2410.71,2730 2530.71,2730 2538.21,2722.5 U7.3
NetR52_1: R52.1 S9.2 | length 87.6
  Top Layer w15: R52.1 2255.22,2559.78 S9.2
NetR52_2: R52.2 R54.1 S9.5 | length 257.6
  Top Layer w15: R54.1 R52.2 2340,2485 2352.52,2472.48 S9.5
NetR53_1: R53.1 S10.2 | length 88.7
  Top Layer w15: R53.1 2527.84,2557.16 S10.2
NetR53_2: R53.2 R56.1 S10.5 | length 260.2
  Top Layer w15: R56.1 R53.2 2615,2555 2615,2480 2622.52,2472.48 S10.5
NetR55_1: R55.1 S9.3 S9.6 | length 267.3
  Top Layer w15: R55.1 2255,2314.78 S9.3 S9.6
NetR57_1: R57.1 S10.3 S10.6 | length 267.3
  Top Layer w15: R57.1 2527.5,2314.66 S10.3 S10.6
NetR60_1: R60.1 S11.2 | length 87.5
  Top Layer w15: S11.2 R60.1
NetR60_2: R60.2 R62.1 S11.5 | length 257.3
  Top Layer w15: R62.1 R60.2 1795,2485 1807.52,2472.48 S11.5
NetR61_1: R61.1 S12.2 | length 88.6
  Top Layer w15: R61.1 1982.61,2557.39 S12.2
NetR61_2: R61.2 R64.1 S12.5 | length 255.6
  Top Layer w15: R64.1 R61.2 2065,2492.48 2085,2472.48 S12.5
NetR63_1: R63.1 S11.3 S11.6 | length 268.2
  Top Layer w15: R63.1 1712.5,2312.5 S11.3 S11.6
NetR65_1: R65.1 S12.3 S12.6 | length 268.2
  Top Layer w15: R65.1 1980,2312.39 S12.3 S12.6
NetS1_2: S1.2 S1.5 | length 180.5
  Top Layer w30: S1.2 S1.5 S1.5@1406.44,252.48
NetS2_2: S2.2 S2.5 | length 183.8
  Top Layer w30: S2.2 S2.5@1145.72,252.48
NetS3_2: S3.2 S3.5 | length 177.2
  Top Layer w30: S3.2 S3.5
NetS4_2: S4.2 S4.5 | length 177.2
  Top Layer w30: S4.2 S4.5
NOUSE1: U8.12
NOUSE2: U8.15
NOUSE3: U8.32
NOUSE4: U8.31
NOUSE5: U8.30
OUT1: R5.2 RL1.2 U1.16 | length 282
  Top Layer w15: RL1.2 R5.2 U1.16
OUT2: R6.2 RL2.2 U1.15 | length 692.8
  Top Layer w15: RL2.2 1189,1250 R6.2 1365,1250 1375,1240 1375,840 1390,825 U1.15
OUT3: R7.2 RL3.2 U1.14 | length 1109.8
  Top Layer w15: RL3.2 1188.5,1722.5 R7.2 1313.5,1725 1370,1725 1400,1695 1400,885 1410,875 U1.14
OUT4: U1.13
OUTPUT1: U1.1 U8.40 | length 983.7
  Top Layer w15: U1.1 1615,775 1580,810 1580,1245 1624,1289 U8.40
OUTPUT2: U1.2 U8.41 | length 861.7
  Top Layer w15: U1.2 1635,825 1605,855 1605,1225 1637,1257 U8.41
OUTPUT3: U1.3 U8.42 | length 734
  Top Layer w15: U1.3 1650,875 1630,895 1630,1189.64 1666.36,1226 U8.42
OUTPUT4: U1.4 U8.44 | length 578.8
  Top Layer w15: U1.4 1675,925 1655,945 1655,1140 1678,1163 U8.44
PWM1: R3.2 U8.16 | length 3026
  Top Layer w15: U8.16 2744,1289 2775,1320 2775,3890 2765,3900 R3.2
PWM2: R4.2 U8.14 | length 3494
  Top Layer w15: R4.2 2395,3935 2409.64,3949.64 2775.36,3949.64 2800,3925 2800,1252 2774,1226 U8.14
PWM3: R1.2 U8.13 | length 4056.4
  Top Layer w15: R1.2 1960,3950 1984.64,3974.64 2790.36,3974.64 2825,3940 2825,1225 2794,1194 U8.13
PWM4: R2.2 U8.43 | length 5239.4
  Top Layer w15: R2.2 1685,3984.29 1700.36,3999.64 2821.87,3999.64 2851.52,3970 2851.52,1171.52 2820,1140 v2(2700,1140) ; v2(1851,1194) U8.43
  Bottom Layer w15: v2(1851,1194) 1851,1159 1870,1140 v2(2700,1140)
R/TXD: D4.1 U8.11 U9.2 U9.3 | length 3663
  Top Layer w15: U8.11 2358,1017 2375,1000 v2(2815,1000)
  Bottom Layer w15: D4.1 2636,3766 2655,3785 U9.2 U9.3 2800,3735 2815,3720 v2(2815,1000)
RESET: P12.2 R59.1 U8.4 | length 1309.5
  Top Layer w10: R59.1 2020,940 1990,910 1990,210 2020,180 2220,180 2235,165 P12.2 ; R59.1@2087.5,940 2138,990.5 U8.4
RXD: U8.9 U9.1 | length 3692.8
  Top Layer w15: U8.9 2295,970 2330,935 v2@2840,935
  Bottom Layer w15: U9.1 2825,3835 2845,3815 v2(2845,935)
SCK: P12.3 U8.3 | length 1243.1
  Top Layer w10: U8.3 2107,1017 2075,985 1990,985 1970,965 1970,180 1990,160 2115,160 2135,140 P12.3
TCK: P11.2 U8.21 | length 367.2
  Top Layer w15: U8.21 2446.5,1446.5 2611.5,1446.5 2630,1465 2630,1545 2655,1570 P11.2
TDI: P11.5 U8.24 | length 641.5
  Top Layer w15: U8.24 2327,1632 2350,1655 2520,1655 2550,1685 2550,1835 2585,1870 P11.5
TDO: P11.4 U8.23 | length 515.1
  Top Layer w15: U8.23 2550,1565 2575,1590 2575,1715 2630,1770 P11.4
TMS: P11.3 U8.22 | length 425.1
  Top Layer w15: U8.22 2567,1477 2605,1515 2605,1645 2630,1670 P11.3
TXD: U8.10 U9.4 | length 3424.5
  Top Layer w15: U8.10 2327,1003 2365,965 v2(2785,965)
  Bottom Layer w15: U9.4 2775,3685 2785,3675 2785,2975 ; v2(2785,965) 2785,3059.65
XTAL1: C28.1 U8.8 Y1.1 | length 803.9
  Top Layer w15: U8.8 2264,936 2290,910 2605,910 2630.5,884.5 Y1.1 2710.5,827 2740.5,797 C28.1
XTAL2: C27.1 U8.7 Y1.2 | length 616.7
  Top Layer w15: U8.7 2232,918 2265,885 2405,885 2430.5,859.5 Y1.2 2365.5,827 2335.5,797 C27.1
模块选择: R66.1 R67.2 U8.33 | length 210.2
  Top Layer w10: R67.2 1947.5,1677.5 R66.1 2044,1673.5 U8.33
pads on no net: P13.9 P13.10 P14.9 P14.10 U1.5 U1.6 U1.7 U1.10 U1.11 U1.12 U2.4 U3.4
copper on no net: | length 173228.3
  Top Layer w10: -21689.92,-12450.94 37365.2,-12450.94 37365.2,15108.11 -17752.91,15108.11 -21689.92,15108.11 -21689.92,-12450.94

## Polygon pours and split planes (outlines as drawn)
GND on Bottom Layer "GND" (solid, remove dead copper, pour order 4): 365,4615 365,4095 cw(c265,4095) 265,3995 110,3995 ccw(c110,3915) 30,3915 30,3850 30,1910 ccw(c130,1910) 130,1810 745,1810 cw(c745,1745) 810,1745 810,1705 810,370 cw(c780,370) 780,340 460,340 ccw(c460,240) 360,240 360,180 360,110 ccw(c460,110) 460,10 1760,10 2365,10 ccw(c2365,110) 2465,110 2465,225 2465,295 cw(c2565,295) 2565,395 2750,395 2765,395 ccw(c2765,495) 2865,495 2865,500 2865,3960 ccw(c2805,3960) 2805,4020 2590,4020 cw(c2590,4120) 2490,4120 2490,4230 2490,4530 ccw(c2390,4530) 2390,4630 400,4630 390,4630 ccw(c390,4605) 365,4605
GND on Top Layer "GND" (solid, remove dead copper, pour order 4): 365,4615 365,4095 cw(c265,4095) 265,3995 110,3995 ccw(c110,3915) 30,3915 30,3850 30,1910 ccw(c130,1910) 130,1810 745,1810 cw(c745,1745) 810,1745 810,1705 810,370 cw(c780,370) 780,340 460,340 ccw(c460,240) 360,240 360,180 360,110 ccw(c460,110) 460,10 1760,10 2365,10 ccw(c2365,110) 2465,110 2465,225 2465,295 cw(c2565,295) 2565,395 2750,395 2765,395 ccw(c2765,495) 2865,495 2865,500 2865,3960 ccw(c2805,3960) 2805,4020 2590,4020 cw(c2590,4120) 2490,4120 2490,4230 2490,4530 ccw(c2390,4530) 2390,4630 400,4630 390,4630 ccw(c390,4605) 365,4605

## Keep-outs
Keep-Out Layer:
  lines w10: 0,118.11 ccw(c118.11,118.11) 118.11,0 ; 0,4527.56 cw(c118.11,4527.56) 118.11,4645.67 ; 255.51,349.58 ccw(c177.17,236.22) 258.84,347.2 ; 255.51,4286.59 ccw(c177.17,4173.23) 258.84,4284.21 ; 1515.34,2436.36 ccw(c1437,2323) 1518.68,2433.98 ; 2755.91,0 ccw(c2755.91,118.11) 2874.02,118.11 ; 2755.91,4645.67 cw(c2755.91,4527.56) 2874.02,4527.56 ; 2775.19,349.58 ccw(c2696.85,236.22) 2778.53,347.2 ; 2775.19,4286.59 ccw(c2696.85,4173.23) 2778.53,4284.21 ; 0,0 2874.02,0 ; 0,0 0,4645.67 ; 0,0 0,4645.67 ; 0,0 2874.02,0 ; 0,4645.67 2874.02,4645.67 ; 0,4645.67 2874.02,4645.67 ; 2874.02,0 2874.02,4645.67 ; 2874.02,0 2874.02,4645.67 ; -61060,-40010 -61060,-36860.39 -57122.99,-36860.39 -57122.99,-40010 -61060,-40010
Mechanical 1:
  lines w10: 1469.53,2370.07 ccw(c1437,2323) 1470.92,2369.08

## Silkscreen, mask and mechanical layers (free items; w line width, h text height)
Top Overlay:
  text "模块选择电阻" at 1275,-615 h120
Mechanical 1:
  lines w10: 0,118.11 ccw(c118.11,118.11) 118.11,0 ; 0,4527.56 cw(c118.11,4527.56) 118.11,4645.67 ; 210.74,284.8 ccw(c177.17,236.22) 212.17,283.78 ; 210.74,4221.81 ccw(c177.17,4173.23) 212.17,4220.79 ; 2730.43,284.8 ccw(c2696.85,236.22) 2731.86,283.78 ; 2730.43,4221.81 ccw(c2696.85,4173.23) 2731.86,4220.79 ; 2755.91,0 ccw(c2755.91,118.11) 2874.02,118.11 ; 2755.91,4645.67 cw(c2755.91,4527.56) 2874.02,4527.56 ; 0,0 2874.02,0 ; 0,0 0,4645.67 ; 0,0 0,4645.67 ; 0,0 2874.02,0 ; 0,4645.67 2874.02,4645.67 ; 0,4645.67 2874.02,4645.67 ; 2874.02,0 2874.02,4645.67 ; 2874.02,0 2874.02,4645.67

## Text inside footprints (layer, text, board x,y; h text height)
C15: Top Overlay "+" at 1501.89,3334.37 h47.24
C16: Top Overlay "+" at 2196.89,3344.37 h47.24
C36: Top Overlay "+" at 2195,615 h47.24 r180